# EAGLE board 7805_1ELB (EAGLE 9.6.2)
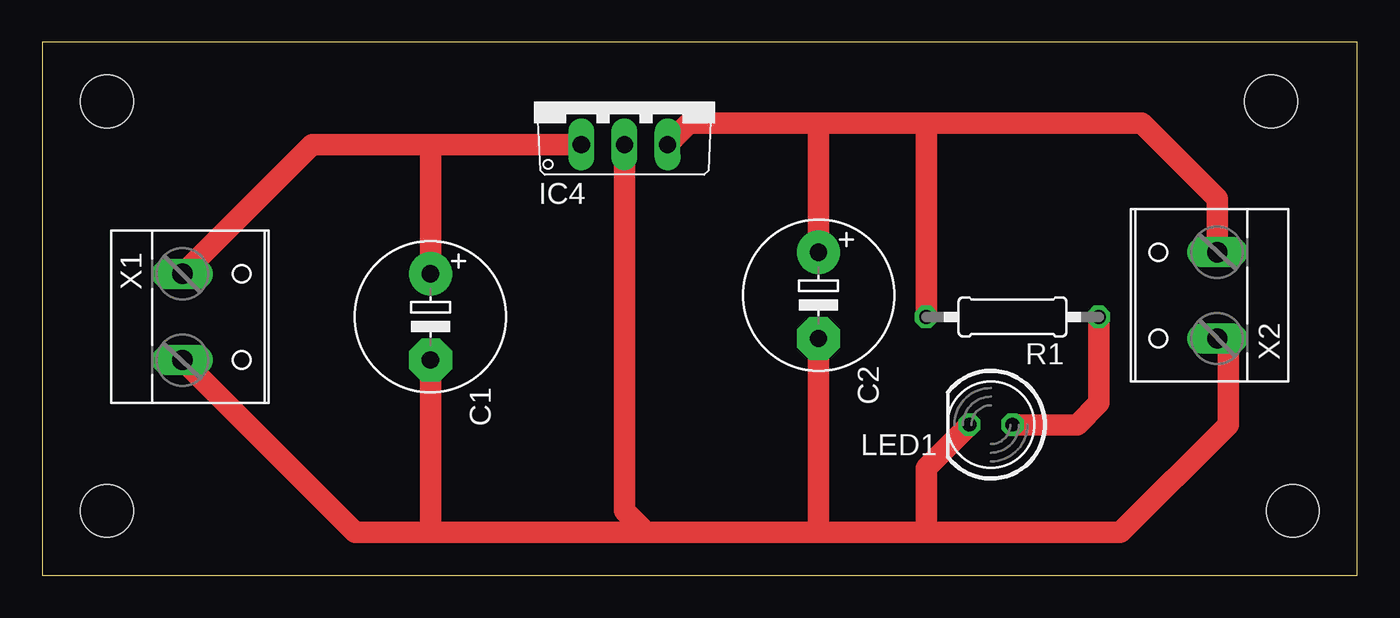
[diagram p0: board, top side]

Size 77.45 x 31.42 mm. Coordinates in mm from the lower left corner, seen from the top.
Outline: 0,0 77.45,0 77.45,31.42 0,31.42 0,0
Copper layers (1*16): Top 0.035mm / dielectric 1.5mm / Bottom 0.035mm
Design rules "default": minimum track width 6mil, minimum drill 0.35mm, track to track 6mil, track to pad 6mil, pad to pad 6mil, via to via 6mil, smd to smd 6mil, copper to edge 40mil, drill to drill 6mil, minimum pad ring 10mil, minimum via ring 8mil, stop-mask expansion 4mil, vias tented up to drill 0mil, thermal gap 10mil
Holes 3.1 mm at 3.81,27.94 3.81,3.81 72.39,27.94 73.66,3.81

## Footprints (pad centres in the part's own frame; a part is rotated, then mirrored left to right if it is on the bottom)
E5-8,5 = drill 1.016 pad 2.54: + -2.54,0 | drill 1.016 pad 2.54 octagon: - 2.54,0
TO220V = drill 1.016 long: 1 -2.54,-2.54; 2 0,-2.54; 3 2.54,-2.54
LED5MM = drill 0.813 octagon: A -1.27,0; K 1.27,0
0207/10 = drill 0.813 octagon: 1 -5.08,0; 2 5.08,0
W237-132 = drill 1.194 long: 1 -2.54,-0.635; 2 2.54,-0.635

## Placement (x,y rotation side)
C1  [E5-8,5]  22.86,15.24 270 top
C2  [E5-8,5]  45.72,16.51 270 top
IC4  7805TV  [TO220V]  34.29,27.94 0 top
LED1  5mm  [LED5MM]  55.88,8.89 180 top
R1  [0207/10]  57.15,15.24 180 top
X1  [W237-132]  8.89,15.24 270 top
X2  [W237-132]  68.58,16.51 90 top

## Library data of the parts
C1 C2 = Clean-Kong
IC4 = linear
LED1 = led
R1 = rcl; SPICEPREFIX: R
X1 X2 = con-wago-508; OC_FARNELL: unknown; OC_NEWARK: unknown

## Nets
GND: C1.- C2.- IC4.2 LED1.K X1.2 X2.1
N$1: C1.+ IC4.1 X1.1
N$2: LED1.A R1.1
VCC: C2.+ IC4.3 R1.2 X2.2

## Tracks (layer width: path | path; a pad name or v marks a point on that pad's centre or on a via)
GND
  Top 1.27: X1.2 18.41,2.54 22.86,2.54 | X2.1 69.85,13.34 69.85,8.89 63.5,2.54 52.07,2.54 | 22.86,2.54 35.56,2.54 | 35.56,2.54 45.72,2.54 | 45.72,2.54 52.07,2.54 | C1.- 22.86,2.54 | C2.- 45.72,2.54 | IC4.2 34.29,3.81 35.56,2.54 | LED1.K 52.07,6.35 52.07,2.54
N$1
  Top 1.27: X1.1 15.88,25.4 22.86,25.4 | 22.86,25.4 IC4.1 | C1.+ 22.86,25.4
N$2
  Top 1.27: LED1.A 60.96,8.89 62.23,10.16 R1.1
VCC
  Top 1.27: IC4.3 38.1,26.67 45.72,26.67 | 45.72,26.67 52.07,26.67 | 52.07,26.67 64.77,26.67 69.22,22.23 X2.2 | C2.+ 45.72,26.67 | R1.2 52.07,26.67